# EAGLE board flic_v2 (EAGLE 6.5.0)
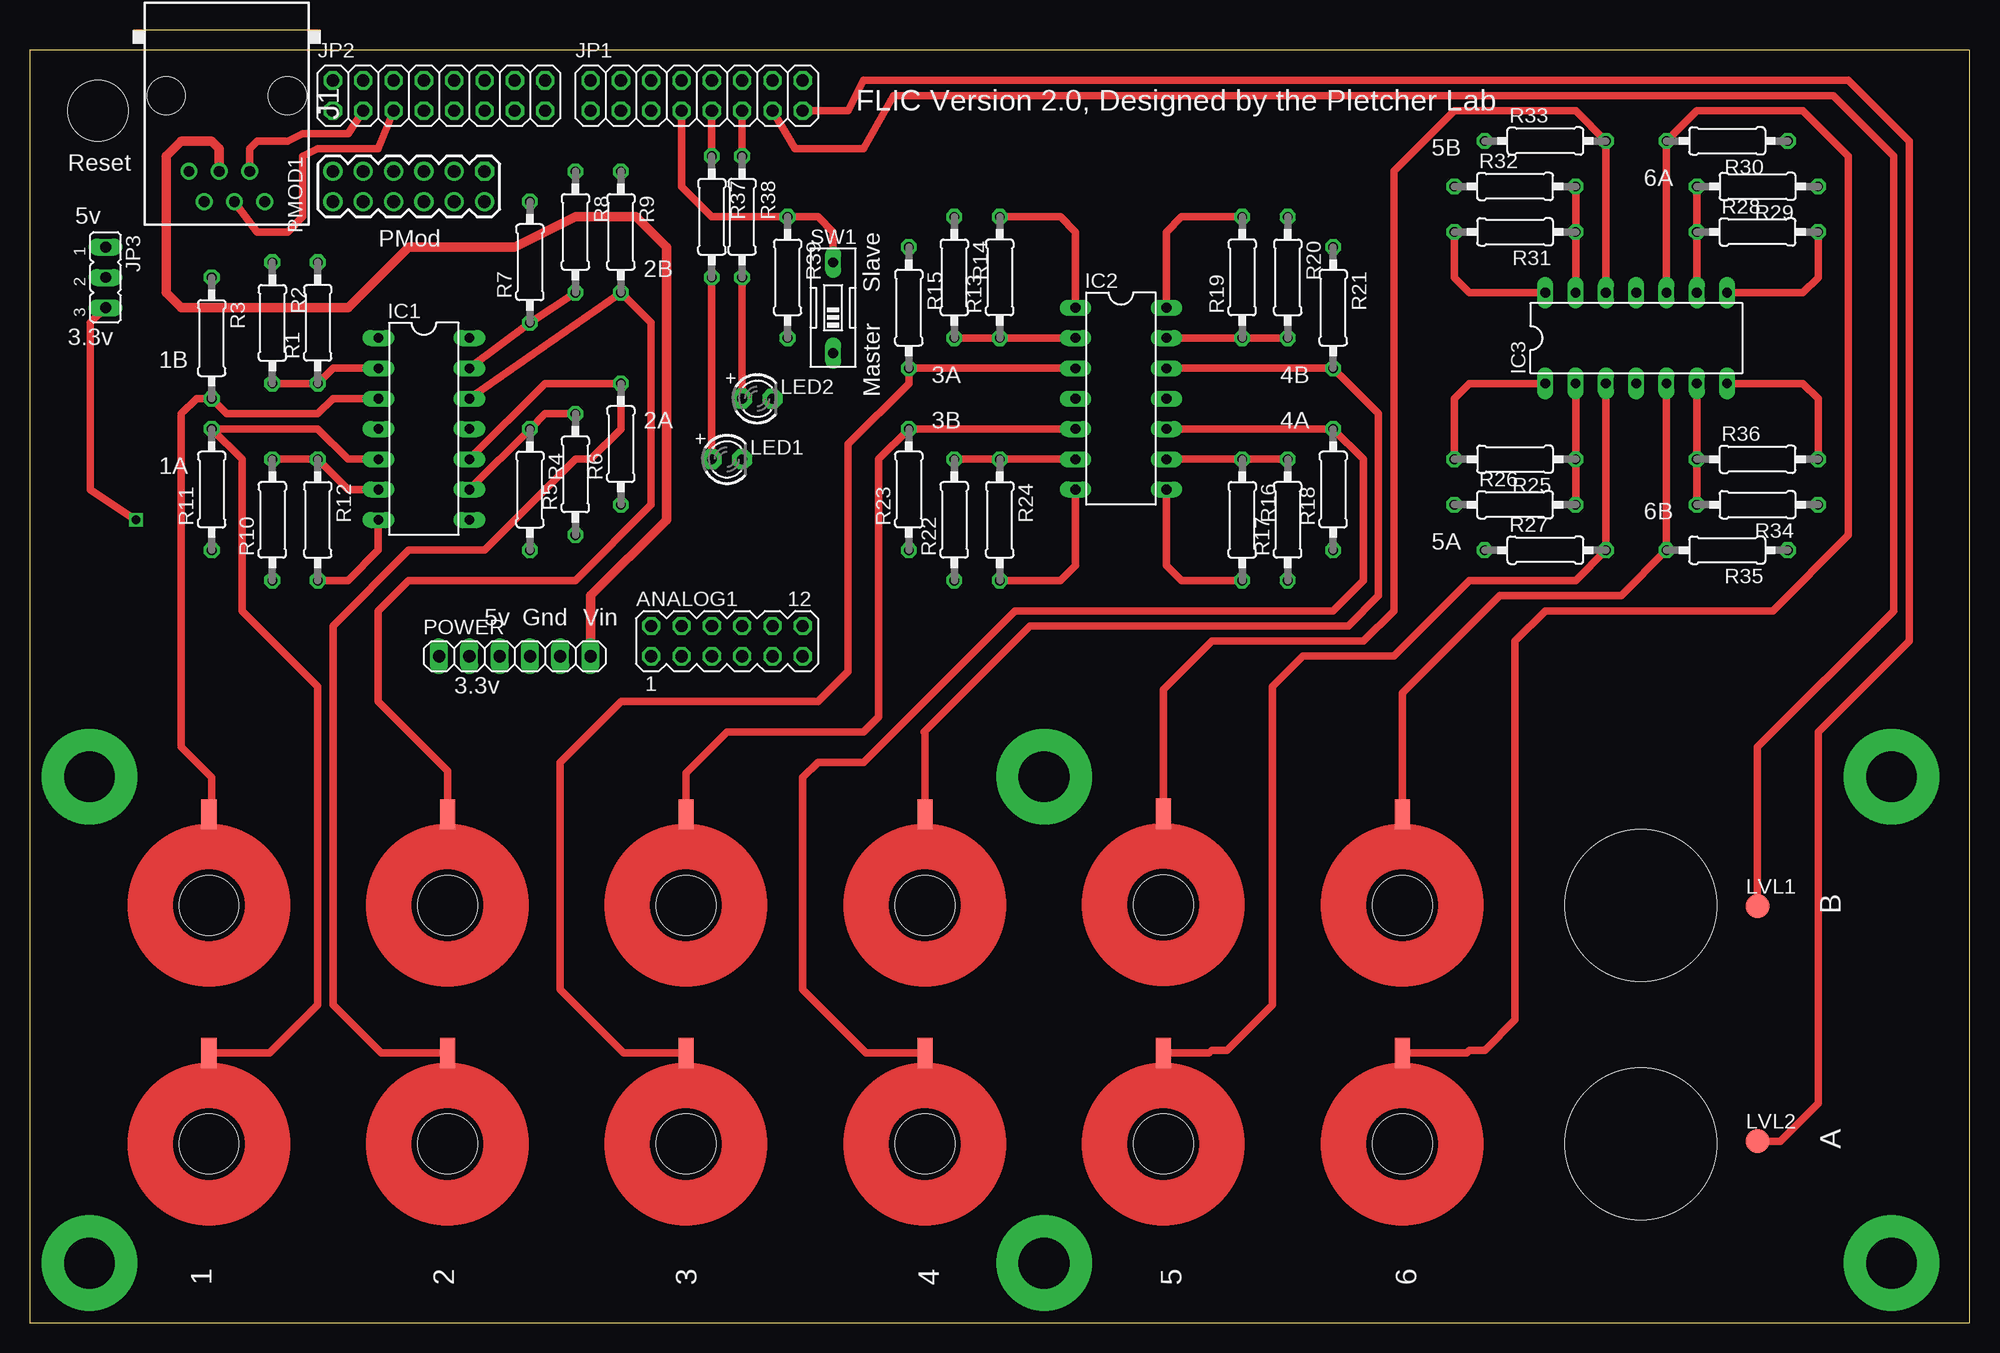
[diagram p0: board, top side]
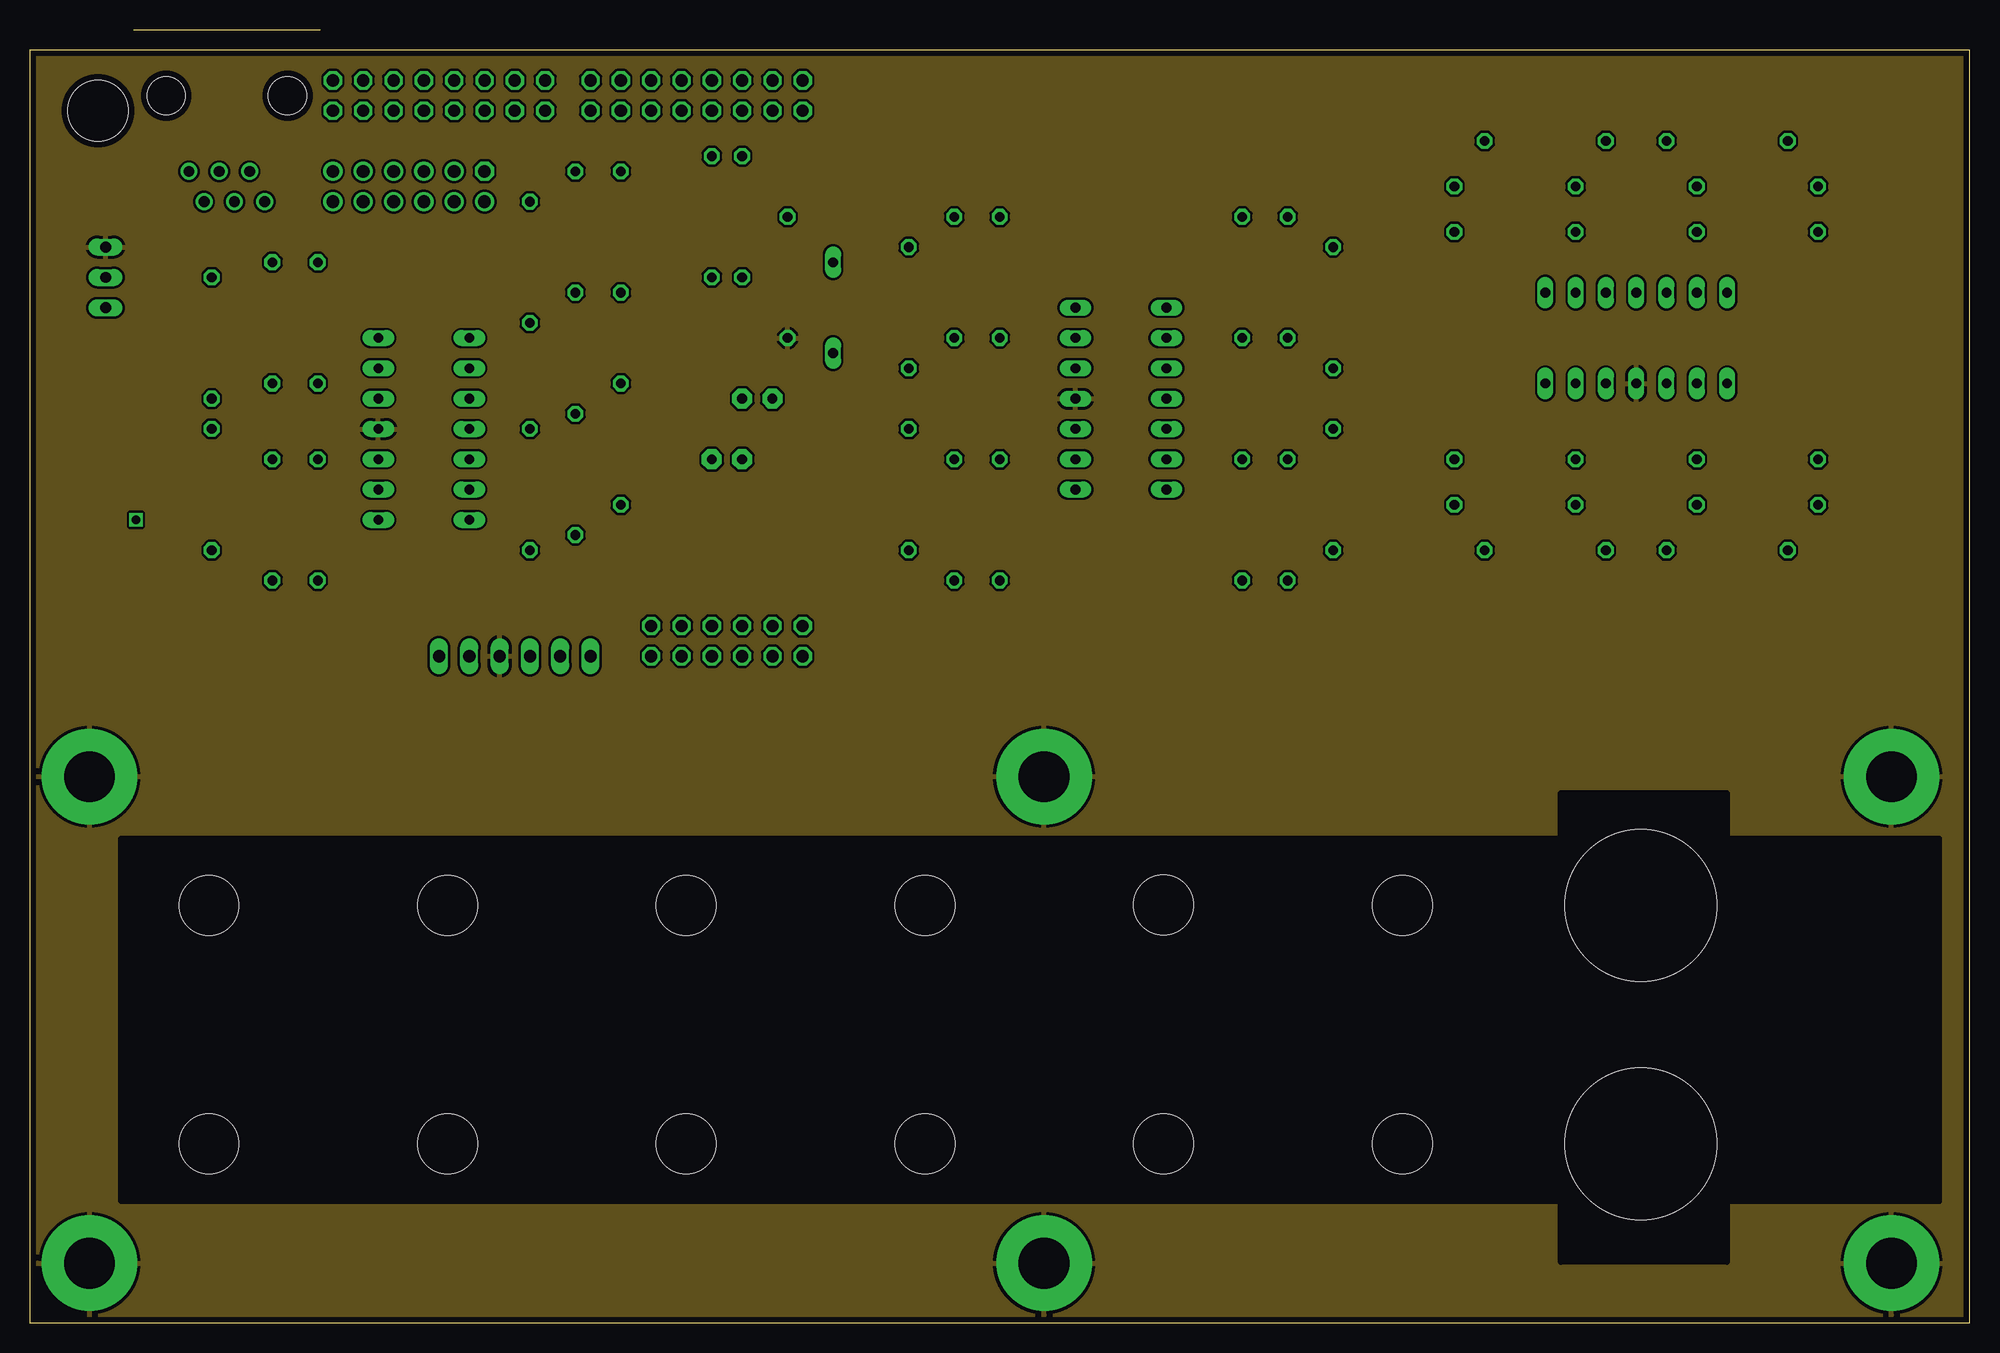
[diagram p1: board, inner layer PWR]
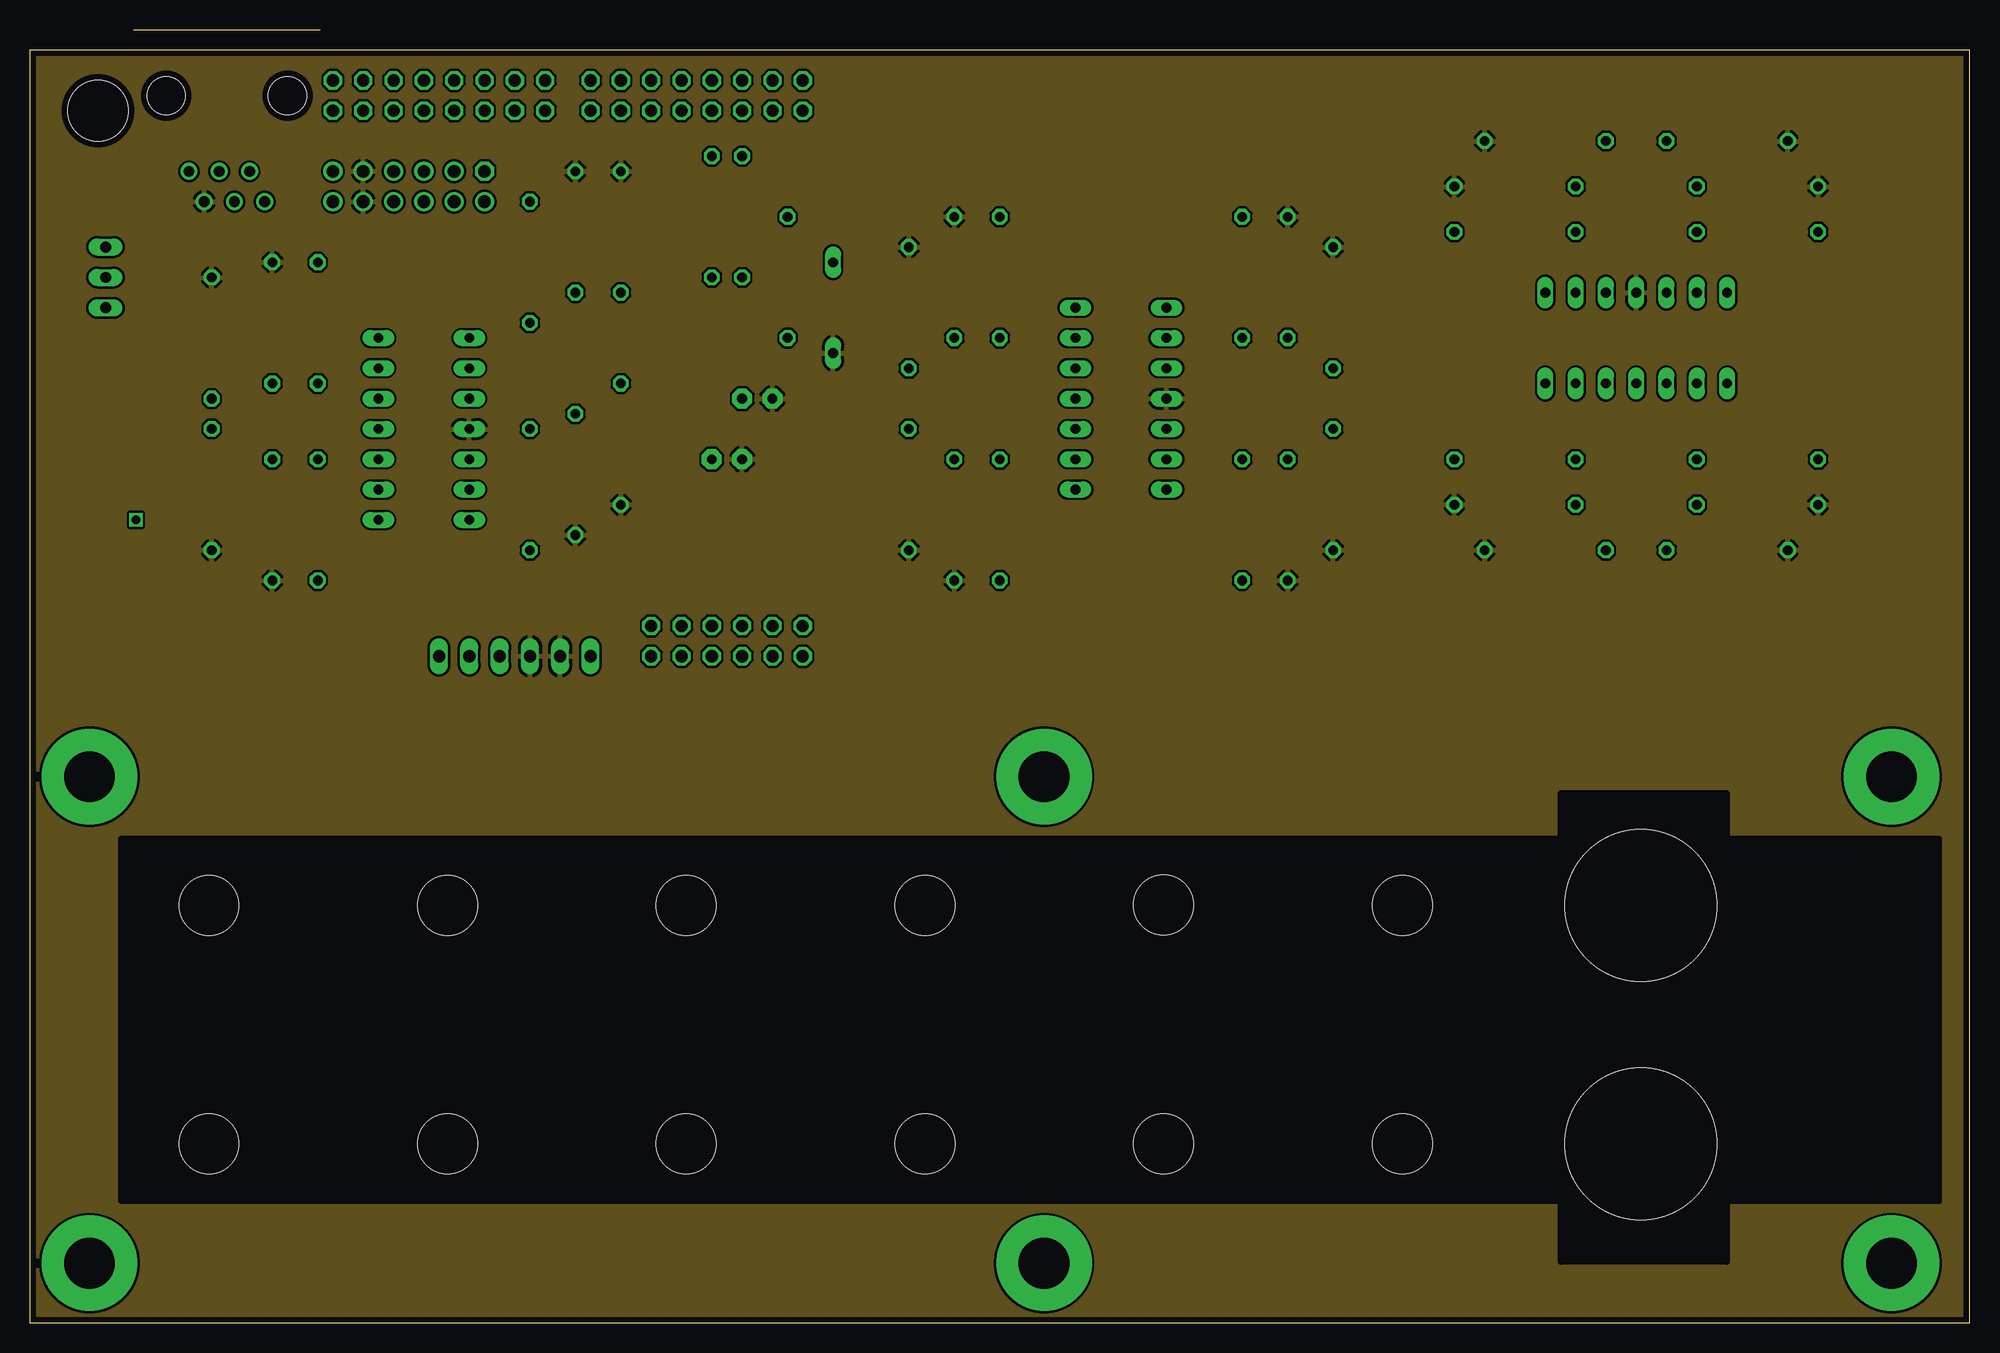
[diagram p2: board, inner layer GND]
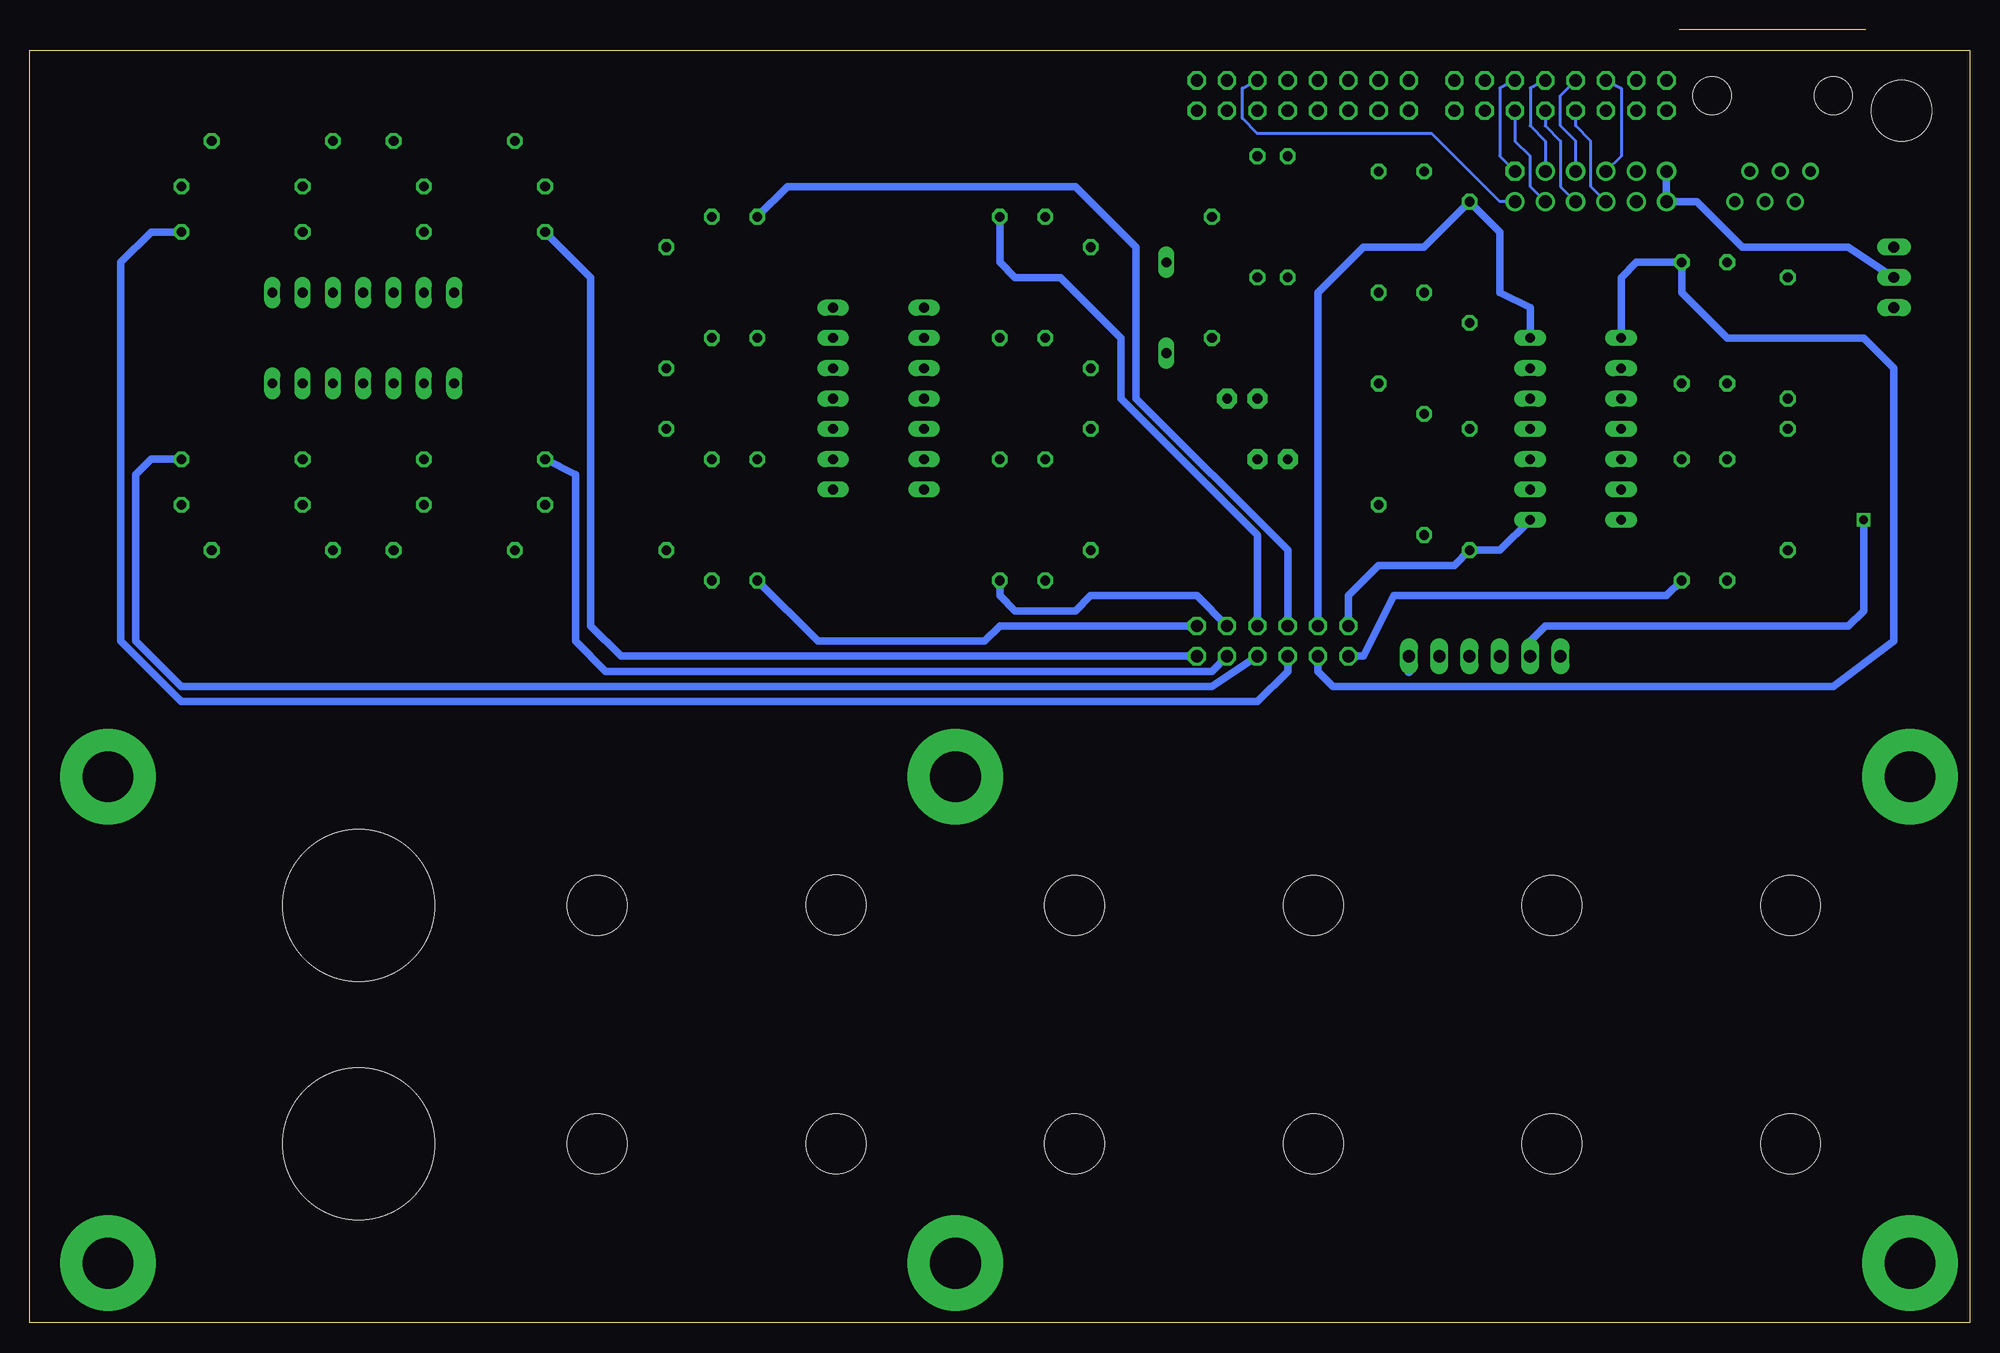
[diagram p3: board, bottom side, seen from below]

Size 162.56 x 106.68 mm. Coordinates in mm from the lower left corner, seen from the top.
Outline: 0,0 162.56,0 162.56,106.68 0,106.68 0,0
Copper layers (1*2+3*16): Top 0.035mm / dielectric 1.5mm / PWR 0.035mm / dielectric 0.15mm / GND 0.035mm / dielectric 0.2mm / Bottom 0.035mm
Design rules "FLICV2 *": minimum track width 10mil, minimum drill 24mil, track to track 8mil, track to pad 8mil, pad to pad 8mil, via to via 8mil, smd to smd 8mil, copper to edge 20mil, drill to drill 8mil, minimum pad ring 10mil, minimum via ring 8mil, stop-mask expansion 2mil, vias tented up to drill 0mil, thermal gap 10mil
Net classes: 0 default: width 0.61 mm
Holes 5.08 mm at 5.71,101.6
Holes 12.7 mm at 135,35 135,15.01

## Footprints (pad centres in the part's own frame; a part is rotated, then mirrored left to right if it is on the bottom)
FLICPAD = smd 2.54 x 1.27: P$1 -7.62,0 | hole 5: 0,0
MA06-2 = drill 1.016 octagon: 1 -6.35,-1.27; 2 -6.35,1.27; 3 -3.81,-1.27; 4 -3.81,1.27; 5 -1.27,-1.27; 6 -1.27,1.27; 7 1.27,-1.27; 8 1.27,1.27; 9 3.81,-1.27; 10 3.81,1.27; 11 6.35,-1.27; 12 6.35,1.27
DIL14 = drill 0.813 long: 1 -7.62,-3.81; 2 -5.08,-3.81; 3 -2.54,-3.81; 4 0,-3.81; 5 2.54,-3.81; 6 5.08,-3.81; 7 7.62,-3.81; 8 7.62,3.81; 9 5.08,3.81; 10 2.54,3.81; 11 0,3.81; 12 -2.54,3.81; 13 -5.08,3.81; 14 -7.62,3.81
RJ11-NO_SHIELD = drill 0.9 pad 1.4: 1 -3.175,8.89; 2 -1.905,6.35; 3 -0.635,8.89; 4 0.635,6.35; 5 1.905,8.89; 6 3.175,6.35 | hole 3.175: -5.08,0; 5.08,0
2X08 = drill 1.016 octagon: 1 -8.89,-1.27; 2 -8.89,1.27; 3 -6.35,-1.27; 4 -6.35,1.27; 5 -3.81,-1.27; 6 -3.81,1.27; 7 -1.27,-1.27; 8 -1.27,1.27; 9 1.27,-1.27; 10 1.27,1.27; 11 3.81,-1.27; 12 3.81,1.27; 13 6.35,-1.27; 14 6.35,1.27; 15 8.89,-1.27; 16 8.89,1.27
JP2 = drill 0.914 long: 1 -2.54,0; 2 0,0; 3 2.54,0
LED3MM = drill 0.813 pad 1.676 octagon: A -1.27,0; K 1.27,0
TP20R = smd 2 x 2: TP 0,0
PMOD-2X6-S = drill 1.067 octagon: 1 -1.27,6.35 | drill 1.067: 2 -1.27,3.81; 3 -1.27,1.27; 4 -1.27,-1.27; 5 -1.27,-3.81; 6 -1.27,-6.35; 7 1.27,6.35; 8 1.27,3.81; 9 1.27,1.27; 10 1.27,-1.27; 11 1.27,-3.81; 12 1.27,-6.35
1X06 = drill 1.016 long: 1 -6.35,0; 2 -3.81,0; 3 -1.27,0; 4 1.27,0; 5 3.81,0; 6 6.35,0
0207/10 = drill 0.813 octagon: 1 -5.08,0; 2 5.08,0
EDG-01 = drill 0.813 long: 1 0,-3.81; 2 0,3.81
4MM = drill 4.242 pad 8.001: P$1 0,0

## Placement (x,y rotation side)
A1  FLIC_PADPAD  [FLICPAD]  15.01,15.01 270 top
A2  FLIC_PADPAD  [FLICPAD]  15.01,35 270 top
ANALOG1  Analog Input  [MA06-2]  58.42,57.15 0 top
B1  FLIC_PADPAD  [FLICPAD]  35,15.01 270 top
B2  FLIC_PADPAD  [FLICPAD]  35,35 270 top
C1  FLIC_PADPAD  [FLICPAD]  54.99,15.01 270 top
C2  FLIC_PADPAD  [FLICPAD]  54.99,35 270 top
D1  FLIC_PADPAD  [FLICPAD]  75.01,15.01 270 top
D2  FLIC_PADPAD  [FLICPAD]  75.01,35 270 top
E1  FLIC_PADPAD  [FLICPAD]  95,15.01 270 top
E2  FLIC_PADPAD  [FLICPAD]  95,35.05 270 top
F1  FLIC_PADPAD  [FLICPAD]  115.01,15.01 270 top
F2  FLIC_PADPAD  [FLICPAD]  115.01,35 270 top
IC1  LM324N  [DIL14]  33.02,74.93 270 top
IC2  LM324N  [DIL14]  91.44,77.47 270 top
IC3  LM324N  [DIL14]  134.62,82.55 0 top
J1  RJ-11  [RJ11-NO_SHIELD]  16.51,102.87 180 top
JP1  JP1  [2X08]  55.88,102.87 0 top
JP2  JP2  [2X08]  34.29,102.87 0 top
JP3  [JP2]  6.35,87.63 270 top
LED1  HB  [LED3MM]  58.42,72.39 0 top
LED2  Sig  [LED3MM]  60.96,77.47 0 top
LVL1  TPSQTP20R  [TP20R]  144.78,34.92 0 top
LVL2  TPSQTP20R  [TP20R]  144.78,15.24 0 top
PMOD1  PMOD-2X6-S  [PMOD-2X6-S]  31.75,95.25 270 top
POWER  Power  [1X06]  40.64,55.88 0 top
R1  4.7K  [0207/10]  24.13,83.82 90 top
R2  27K  [0207/10]  20.32,83.82 270 top
R3  10M  [0207/10]  15.24,82.55 270 top
R4  4.7K  [0207/10]  41.91,69.85 270 top
R5  27K  [0207/10]  45.72,71.12 90 top
R6  10M  [0207/10]  49.53,73.66 90 top
R7  4.7K  [0207/10]  41.91,88.9 90 top
R8  27K  [0207/10]  45.72,91.44 270 top
R9  10M  [0207/10]  49.53,91.44 270 top
R10  27K  [0207/10]  20.32,67.31 90 top
R11  10M  [0207/10]  15.24,69.85 90 top
R12  4.7K  [0207/10]  24.13,67.31 270 top
R13  4.7K  [0207/10]  81.28,87.63 90 top
R14  27K  [0207/10]  77.47,87.63 270 top
R15  10M  [0207/10]  73.66,85.09 270 top
R16  4.7K  [0207/10]  101.6,67.31 270 top
R17  27K  [0207/10]  105.41,67.31 90 top
R18  10M  [0207/10]  109.22,69.85 90 top
R19  4.7K  [0207/10]  101.6,87.63 90 top
R20  27K  [0207/10]  105.41,87.63 270 top
R21  10M  [0207/10]  109.22,85.09 270 top
R22  27K  [0207/10]  77.47,67.31 90 top
R23  10M  [0207/10]  73.66,69.85 90 top
R24  4.7K  [0207/10]  81.28,67.31 270 top
R25  4.7K  [0207/10]  124.46,72.39 180 top
R26  27K  [0207/10]  124.46,68.58 0 top
R27  10M  [0207/10]  127,64.77 0 top
R28  4.7K  [0207/10]  144.78,91.44 0 top
R29  27K  [0207/10]  144.78,95.25 180 top
R30  10M  [0207/10]  142.24,99.06 180 top
R31  4.7K  [0207/10]  124.46,91.44 180 top
R32  27K  [0207/10]  124.46,95.25 0 top
R33  10M  [0207/10]  127,99.06 0 top
R34  27K  [0207/10]  144.78,68.58 180 top
R35  10M  [0207/10]  142.24,64.77 180 top
R36  4.7K  [0207/10]  144.78,72.39 0 top
R37  220  [0207/10]  57.15,92.71 270 top
R38  220  [0207/10]  59.69,92.71 270 top
R39  27K  [0207/10]  63.5,87.63 270 top
SW1  [EDG-01]  67.31,85.09 0 top
U$1  4MM_HOLEA  [4MM]  5,45.8 0 top
U$2  4MM_HOLEA  [4MM]  5,5 0 top
U$3  4MM_HOLEA  [4MM]  84.99,5 0 top
U$4  4MM_HOLEA  [4MM]  156.01,5 0 top
U$5  4MM_HOLEA  [4MM]  156.01,45.8 0 top
U$6  4MM_HOLEA  [4MM]  84.99,45.8 0 top

## Library data of the parts
A1 A2 B1 B2 C1 C2 D1 D2 E1 E2 F1 F2 U$1-U$6 = SDP
ANALOG1 = con-lstb; OC_FARNELL: unknown; OC_NEWARK: unknown
IC1-IC3 = linear
J1 = con-tycoelectronics; MF: TYCO ELECTRONICS; MPN: RJ11-2L-B; OC_FARNELL: unknown; OC_NEWARK: 83F4463
JP1 JP2 POWER = pinhead
JP3 = jumper
LED1 LED2 = adafruit
LVL1 LVL2 = testpad
PMOD1 = chipKIT MX3
R1-R39 = resistor
SW1 = special

## Nets
+5V: IC1.4 IC2.4 IC3.4 JP3.1 POWER.3 R39.2 U$1.P$1 U$2.P$1 U$3.P$1 U$4.P$1 U$5.P$1 U$6.P$1
GND: IC1.11 IC2.11 IC3.11 J1.5 LED1.K LED2.K PMOD1.5 PMOD1.11 POWER.4 POWER.5 R2.1 R3.1 R5.1 R6.1 R8.1 R9.1 R10.1 R11.1 R14.1 R15.1 R17.1 R18.1 R20.1 R21.1 R22.1 R23.1 R26.1 R27.1 R29.1 R30.1 R32.1 R33.1 R34.1 R35.1 SW1.1
N$1: IC1.2 R1.1 R2.2
N$2: A2.P$1 IC1.3 R3.2
N$3: IC1.13 R7.1 R8.2
N$4: A1.P$1 IC1.5 R11.2
N$5: B1.P$1 IC1.10 R6.2
N$6: IC2.2 R13.1 R14.2
N$7: C1.P$1 IC2.3 R15.2
N$8: B2.P$1 IC1.12 R9.2
N$9: ANALOG1.4 IC1.14 R7.2
N$10: IC1.6 R10.2 R12.1
N$11: JP2.10 PMOD1.2
N$12: D1.P$1 IC2.10 R18.2
N$13: IC1.9 R4.1 R5.2
N$14: ANALOG1.3 IC1.1 R1.2
N$15: ANALOG1.1 IC1.7 R12.2
N$16: D2.P$1 IC2.12 R21.2
N$17: ANALOG1.6 IC2.14 R19.2
N$18: IC2.6 R22.2 R24.1
N$19: IC2.9 R16.1 R17.2
N$20: C2.P$1 IC2.5 R23.2
N$21: IC3.2 R25.1 R26.2
N$22: ANALOG1.12 IC2.8 R16.2
N$23: ANALOG1.10 IC2.7 R24.2
N$24: IC2.13 R19.1 R20.2
N$25: ANALOG1.8 IC2.1 R13.2
N$26: E1.P$1 IC3.3 R27.2
N$27: F1.P$1 IC3.10 R30.2
N$28: E2.P$1 IC3.12 R33.2
N$29: ANALOG1.11 IC3.14 R31.2
N$30: IC3.6 R34.2 R36.1
N$31: IC3.9 R28.1 R29.2
N$32: F2.P$1 IC3.5 R35.2
N$33: ANALOG1.5 IC3.8 R28.2
N$34: ANALOG1.7 IC3.7 R36.2
N$35: IC3.13 R31.1 R32.2
N$36: JP2.8 PMOD1.3
N$37: LED1.A R37.2
N$38: LED2.A R38.2
N$39: JP1.9 R37.1
N$40: JP1.11 R38.1
N$41: JP1.13 LVL1.TP
N$42: JP1.15 LVL2.TP
N$43: J1.2 JP2.3
N$44: J1.3 JP2.5
N$45: J1.4 POWER.6
N$46: ANALOG1.9 IC3.1 R25.2
N$47: JP2.6 PMOD1.4
N$48: ANALOG1.2 IC1.8 R4.2
N$49: JP1.12 PMOD1.7
N$50: JP2.11 PMOD1.8
N$51: JP2.9 PMOD1.9
N$52: JP2.12 PMOD1.1
N$53: JP2.7 PMOD1.10
N$54: JP3.2 PMOD1.6 PMOD1.12
N$55: JP3.3 POWER.2
N$56: JP1.7 R39.1 SW1.2

## Tracks (layer width: path | path; a pad name or v marks a point on that pad's centre or on a via)
+5V
  pour PWR: 0,106.68 162.56,106.68 162.56,0 0,0
GND
  pour GND: 0,106.68 162.56,106.68 162.56,0 0,0
N$1
  Top 0.61: R2.2 R1.1 25.4,80.01 IC1.2
N$2
  Top 0.61: IC1.3 25.4,77.47 24.13,76.2 16.51,76.2 R3.2 13.97,77.47 12.7,76.2 12.7,48.26 15.24,45.72 15.24,42.85 A2.P$1
N$3
  Top 0.61: IC1.13 R7.1 R8.2
N$4
  Top 0.61: A1.P$1 20.09,22.63 24.13,26.67 24.13,53.34 17.78,59.69 17.78,72.39 R11.2 24.13,74.93 26.67,72.39 IC1.5
N$5
  Top 0.61: B1.P$1 29.44,22.63 25.4,26.67 25.4,58.42 31.75,64.77 38.1,64.77 45.72,72.39 46.99,72.39 49.53,74.93 R6.2 43.18,78.74 IC1.10
N$6
  Top 0.61: IC2.2 R13.1 R14.2
N$7
  Top 0.61: IC2.3 R15.2 73.66,78.74 68.58,73.66 68.58,54.61 66.04,52.07 49.53,52.07 44.45,46.99 44.45,27.94 49.76,22.63 C1.P$1
N$8
  Top 0.61: IC1.12 R9.2 52.07,83.82 52.07,68.58 45.72,62.23 31.75,62.23 29.21,59.69 29.21,52.07 35,46.28 B2.P$1
N$9
  Bottom 0.61: IC1.14 36.83,85.09 39.37,86.36 39.37,91.44 R7.2 45.72,90.17 50.8,90.17 54.61,86.36 ANALOG1.4
N$10
  Top 0.61: IC1.6 26.67,69.85 R12.1 R10.2
N$11
  Bottom 0.254: JP2.10 36.83,103.5 36.83,100.33 35.56,99.06 PMOD1.2
N$12
  Top 0.61: IC2.10 R18.2 111.76,72.39 111.76,62.23 109.22,59.69 82.55,59.69 69.85,46.99 66.04,46.99 64.77,45.72 64.77,27.94 70.08,22.63 D1.P$1
N$13
  Top 0.61: IC1.9 R4.1 43.18,76.2 R5.2
N$14
  Bottom 0.61: IC1.1 29.21,87.63 27.94,88.9 R1.2 24.13,86.36 20.32,82.55 8.89,82.55 6.35,80.01 6.35,57.15 11.43,53.34 53.34,53.34 54.61,54.61 ANALOG1.3
N$15
  Top 0.61: IC1.7 29.21,64.77 26.67,62.23 R12.2
  Bottom 0.61: R12.2 25.4,60.96 48.26,60.96 50.8,55.88 ANALOG1.1
N$16
  Top 0.61: IC2.12 R21.2 113.03,76.2 113.03,60.96 110.49,58.42 83.82,58.42 74.93,49.53 75.01,49.45 D2.P$1
N$17
  Top 0.61: R19.2 96.52,92.71 95.25,91.44 IC2.14
  Bottom 0.61: ANALOG1.6 57.15,64.77 69.85,77.47 69.85,90.17 74.93,95.25 99.06,95.25 R19.2
N$18
  Top 0.61: IC2.6 R24.1 R22.2
N$19
  Top 0.61: R17.2 R16.1 IC2.9
N$20
  Top 0.61: IC2.5 R23.2 71.12,72.39 71.12,50.8 69.85,49.53 58.42,49.53 54.99,46.1 C2.P$1
N$21
  Top 0.61: IC3.2 R25.1 R26.2
N$22
  Top 0.61: IC2.8 95.25,63.5 96.52,62.23 R16.2
  Bottom 0.61: ANALOG1.12 81.28,58.42 82.55,57.15 96.52,57.15 R16.2
N$23
  Top 0.61: IC2.7 87.63,63.5 86.36,62.23 R24.2
  Bottom 0.61: R24.2 81.28,60.96 80.01,59.69 74.93,59.69 73.66,60.96 64.77,60.96 ANALOG1.10
N$24
  Top 0.61: IC2.13 R19.1 R20.2
N$25
  Top 0.61: R13.2 86.36,92.71 87.63,91.44 IC2.1
  Bottom 0.61: ANALOG1.8 59.69,66.04 71.12,77.47 71.12,82.55 76.2,87.63 80.01,87.63 81.28,88.9 R13.2
N$26
  Top 0.61: IC3.3 R27.2 129.54,62.23 120.65,62.23 114.3,55.88 106.68,55.88 104.14,53.34 104.14,26.67 100.33,22.86 99.06,22.86 98.83,22.63 E1.P$1
N$27
  Top 0.61: F1.P$1 120.42,22.63 120.65,22.86 121.92,22.86 124.46,25.4 124.46,57.15 127,59.69 146.05,59.69 152.4,66.04 152.4,97.79 148.59,101.6 139.7,101.6 R30.2 IC3.10
N$28
  Top 0.61: IC3.12 R33.2 129.54,101.6 119.38,101.6 114.3,96.52 114.3,59.69 111.76,57.15 99.06,57.15 95,53.09 E2.P$1
N$29
  Top 0.61: R31.2 119.38,87.63 120.65,86.36 IC3.14
  Bottom 0.61: ANALOG1.11 113.03,55.88 115.57,58.42 115.57,87.63 R31.2
N$30
  Top 0.61: IC3.6 R36.1 R34.2
N$31
  Top 0.61: R29.2 R28.1 IC3.9
N$32
  Top 0.61: IC3.5 R35.2 133.35,60.96 123.19,60.96 115.01,52.78 F2.P$1
N$33
  Top 0.61: R28.2 149.86,87.63 148.59,86.36 IC3.8
  Bottom 0.61: ANALOG1.5 57.15,54.61 59.69,52.07 149.86,52.07 154.94,57.15 154.94,88.9 152.4,91.44 R28.2
N$34
  Top 0.61: IC3.7 148.59,78.74 149.86,77.47 R36.2
  Bottom 0.61: ANALOG1.7 63.5,53.34 149.86,53.34 153.67,57.15 153.67,71.12 152.4,72.39 R36.2
N$35
  Top 0.61: IC3.13 R31.1 R32.2
N$36
  Bottom 0.254: PMOD1.3 33.02,99.06 34.29,100.33 34.29,102.87 JP2.8
N$37
  Top 0.61: R37.2 LED1.A
N$38
  Top 0.61: R38.2 LED2.A
N$39
  Top 0.61: JP1.9 R37.1
N$40
  Top 0.61: JP1.11 R38.1
N$41
  Top 0.61: JP1.13 64.14,98.42 69.85,98.42 72.39,102.87 151.13,102.87 156.21,97.79 156.21,59.69 144.78,48.26 LVL1.TP
N$42
  Top 0.61: JP1.15 68.58,101.6 69.85,104.14 152.4,104.14 157.48,99.06 157.48,57.15 149.86,49.53 149.86,18.41 146.69,15.24 LVL2.TP
N$43
  Top 0.61: J1.2 18.41,98.42 19.05,99.06 21.59,99.06 22.86,99.69 26.67,99.69 JP2.3
N$44
  Top 0.61: J1.3 19.05,91.44 21.59,91.44 22.86,92.71 22.86,97.79 24.13,98.42 29.21,98.42 JP2.5
N$45
  Top 0.813: POWER.6 46.99,60.96 53.34,67.31 53.34,90.17 50.8,92.71 45.72,92.71 40.64,90.17 31.75,90.17 26.67,85.09 12.7,85.09 11.43,86.36 11.43,97.79 12.7,99.06 15.24,99.06 15.88,98.42 J1.4
  Bottom 0.813: POWER.6 46.99,54.61
N$46
  Top 0.61: IC3.1 120.65,78.74 119.38,77.47 R25.2
  Bottom 0.61: ANALOG1.9 63.5,54.61 114.3,54.61 116.84,57.15 116.84,71.12 R25.2
N$47
  Bottom 0.254: JP2.6 29.21,103.5 29.21,97.79 PMOD1.4
N$48
  Bottom 0.61: IC1.8 39.37,64.77 R4.2 43.18,63.5 49.53,63.5 52.07,60.96 ANALOG1.2
N$49
  Bottom 0.254: PMOD1.7 39.37,93.98 45.09,99.69 59.69,99.69 60.96,100.97 60.96,103.5 JP1.12
N$50
  Bottom 0.254: JP2.11 38.1,99.06 36.83,97.79 36.83,95.25 PMOD1.8
N$51
  Bottom 0.254: JP2.9 35.56,100.33 34.29,99.06 34.29,95.25 PMOD1.9
N$52
  Bottom 0.254: JP2.12 39.37,103.5 39.37,97.79 PMOD1.1
N$53
  Bottom 0.254: PMOD1.10 31.75,95.25 31.75,99.06 33.02,100.33 JP2.7
N$54
  Bottom 0.61: JP3.2 10.16,90.17 19.05,90.17 22.86,93.98 PMOD1.12 PMOD1.6
N$55  (via drill 0.7)
  Top 0.61: v8.89,67.31 5.08,69.85 5.08,83.82 JP3.3
  Bottom 0.61: POWER.2 36.83,57.15 35.56,58.42 10.16,58.42 8.89,59.69 v8.89,67.31
N$56
  Top 0.61: SW1.2 67.31,91.44 66.04,92.71 R39.1 57.15,92.71 54.61,95.25 JP1.7
N$57
  cutout PWR: 7.62,40.64 160.02,40.64 160.02,10.16 7.62,10.16
  cutout GND: 7.62,40.64 160.02,40.64 160.02,10.16 7.62,10.16
N$58
  cutout PWR: 128.27,44.45 142.24,44.45 142.24,40.64 142.24,38.1 128.27,38.1
  cutout GND: 128.27,44.45 142.24,44.45 142.24,40.64 142.24,38.1 128.27,38.1
  cutout GND: 128.27,11.43 142.24,11.43 142.24,7.62 142.24,5.08 128.27,5.08
  cutout PWR: 128.27,11.43 142.24,11.43 142.24,7.62 142.24,5.08 128.27,5.08

## Text on the board
tPlace: FLIC Version 2.0, Designed by the Pletcher Lab | 5B | Reset | 6A | 5v | Slave | PMod | 2B | Master | 3.3v | 1B | 3A | 4B | 2A | 3B | 4A | 1A | 6B | 5A | 5v | Gnd | Vin | 3.3v | B | A | 1 | 2 | 3 | 4 | 5 | 6